# Altium PCB fan_tolips_f1_v1.PcbDoc
Units mm, origin at the board's own origin, x right, y up, seen from the top; angles counter-clockwise.
Board outline 46 x 221.4 mm, 2 copper layers (Top Layer, Bottom Layer); 52 components, 74 nets, 185 pads, 0 vias.
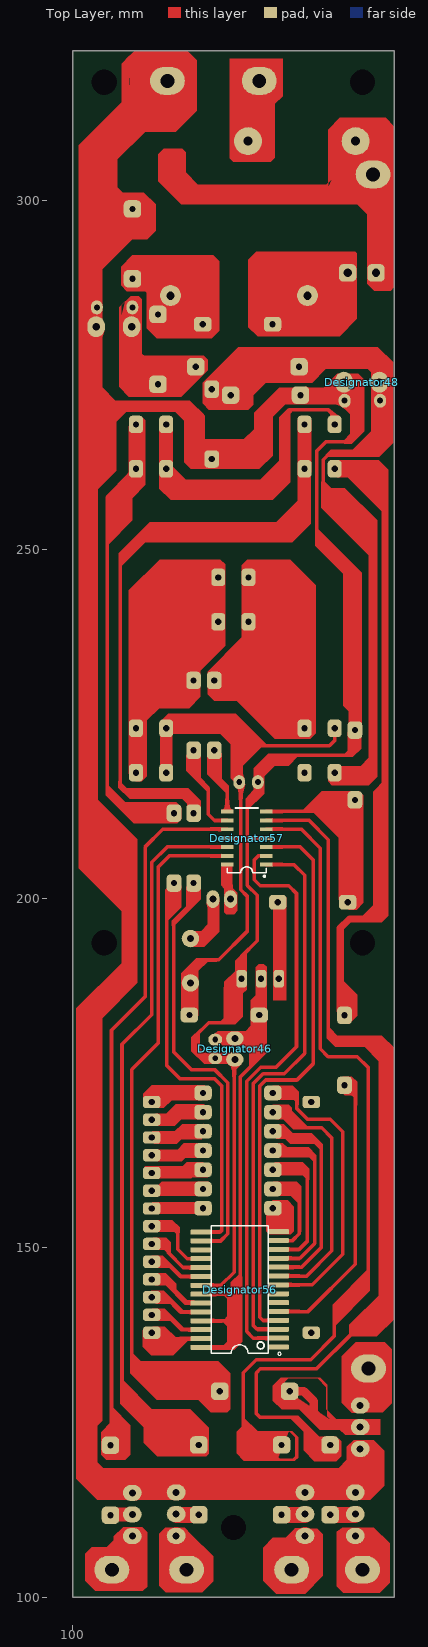
[diagram p0: Top Layer view]
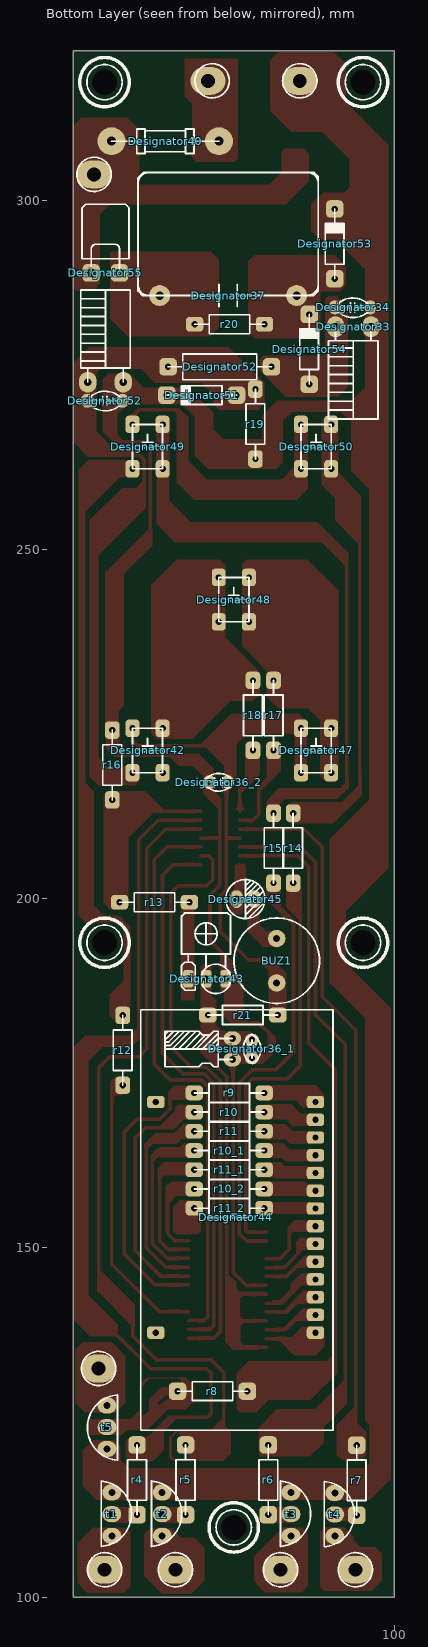
[diagram p1: Bottom Layer view, seen from below]

## Layer stack, top to bottom
Top Solder: solder mask 0.0102, Solder Resist, Dk 3.5
Top Layer: signal copper 0.0356
Dielectric 1: dielectric 0.32, FR-4, Dk 4.8
Bottom Layer: signal copper 0.0356
Bottom Solder: solder mask 0.0102, Solder Resist, Dk 3.5

## Board outline
100,100 146,100 146,321.4 100,321.4

## Design rules (kind name [scope] priority, off if disabled: settings)
Clearance [All] p1: gap=0.381 ignorepadtopadclearanceinfootprint=FALSE
ComponentClearance [All] p1: gap=0 collisioncheckmode=3 verticalgap=0 showdistances=FALSE
PolygonConnect [All] p1: connectstyle=Relief reliefconductorwidth=0.254 reliefentries=4 polygonreliefangle="90 Angle" airgapwidth=0.254
RoutingVias [All] p1: holewidth=0.711 width=1.27 viastyle="Through Hole" minholewidth=0.711 minwidth=1.27 maxholewidth=0.711 maxwidth=1.27
SolderMaskExpansion [All] p1: expansion=0.102
Width [All] p1: maxlimit=5 minlimit=0.254 preferedwidth=0.254 minimp=50.000000 maximp=50.000000 favimp=50.000000
29 further rules are at their usual default settings.

## Components (designator, comment, footprint, x,y, rotation, side; value= is the part's Value field where it differs from the comment)
BUZ1 "Comment" BUZZER 116.85,187.95 r90 bottom
Designator33 "Comment" CAP-EL-200MIL-RA 103.35,281.9 r0 bottom
Designator34 "Comment" CAP-ADASI-200MIL 108.53,284.65 r180 bottom
Designator36_1 "Comment" CAP-ADASI-105MIL 120.4,179.828 r270 bottom
Designator36_2 "Comment" CAP-ADASI-105MIL 123.833,216.7 r0 bottom
Designator37 "Comment" CAP-POLY 133.601,286.35 r180 bottom
Designator40 "Comment" FUZE 125.1,308.45 r0 bottom
Designator42 "Comment" SW-PUSH 137.5,218.05 r180 bottom locked
Designator43 "Comment" IR-RECIVER 129.5,188.55 r180 bottom
Designator44 "Comment" display_f1 111.3,170.9 r0 bottom locked
Designator45 "Comment" CAP-EL-100MIL 122.6,199.95 r180 bottom
Designator46 "Comment" CAP-EL-105MIL-RA 123.2,180 r270 top
Designator47 "Comment" SW-PUSH 113.368,218.05 r180 bottom locked
Designator48 "Comment" CAP-EL-200MIL-RA 138.82,273.95 r0 top
Designator48 "Comment" SW-PUSH 125.15,239.65 r180 bottom locked
Designator49 "Comment" SW-PUSH 137.5,261.55 r180 bottom locked
Designator50 "Comment" SW-PUSH 113.368,261.55 r180 bottom locked
Designator51 "Comment" DIOD 132.6,272.1 r180 bottom
Designator52 "Comment" RES-0.5W 132.4,276.15 r180 bottom
Designator52 "Comment" CAP-ADASI-200MIL 144,271.3 r180 bottom
Designator53 "Comment" DIOD 108.55,298.75 r270 bottom
Designator54 "Comment" DIOD 112.2,283.65 r270 bottom
Designator55 "Comment" SELF 143.414,289.6 r180 bottom
Designator56 "Comment" sop-28 123.9,144.05 r180 top
Designator57 "Comment" SOP-14 127.7,204.9 r180 top
r4 "Comment" RES-0.25W#1 136.85,111.8 r90 bottom
r5 "Comment" RES-0.25W#1 129.9,111.8 r90 bottom
r6 "Comment" RES-0.25W#1 118.05,111.8 r90 bottom
r7 "Comment" RES-0.25W#1 105.4,111.75 r90 bottom
r8 "Comment" RES-0.25W#1 131.05,129.5 r180 bottom
r9 "Comment" RES-0.25W#2 128.65,172.2 r180 bottom
r10 "Comment" RES-0.25W#2 128.65,169.45 r180 bottom
r10_1 "Comment" RES-0.25W#2 128.65,163.95 r180 bottom
r10_2 "Comment" RES-0.25W#2 128.65,158.45 r180 bottom
r11 "Comment" RES-0.25W#2 128.65,166.7 r180 bottom
r11_1 "Comment" RES-0.25W#2 128.65,161.2 r180 bottom
r11_2 "Comment" RES-0.25W#2 128.65,155.7 r180 bottom
r12 "Comment" RES-0.25W#2 138.9,183.3 r270 bottom
r13 "Comment" RES-0.25W#2 139.35,199.5 r180 bottom
r14 "Comment" RES-0.25W#2 114.5,212.25 r270 bottom
r15 "Comment" RES-0.25W#2 117.3,212.25 r270 bottom
r16 "Comment" RES-0.25W#2 140.4,224.15 r270 bottom
r17 "Comment" RES-0.25W#2 117.3,231.25 r270 bottom
r18 "Comment" RES-0.25W#2 120.25,231.25 r270 bottom
r19 "Comment" RES-0.25W#2 119.9,272.95 r270 bottom
r20 "Comment" RES-0.25W#2 118.6,282.25 r0 bottom
r21 "Comment" RES-0.25W#2 126.7,183.35 r180 bottom
t1 "Comment" bt131 140.45,115 r270 bottom
t2 "Comment" bt131 133.25,115 r270 bottom
t3 "Comment" bt131 114.8,115 r270 bottom
t4 "Comment" bt131 108.53,114.95 r270 bottom
t5 "Comment" bt131 141.15,121.25 r90 bottom

## Footprints (in the part's own frame and the unit in brackets; to place one, negate y for a bottom-side part, rotate by r counter-clockwise, add the part's x,y. Pads: shape width x height; smd on the part's side, far side on the other; paste and mask are expansions set on the pad)
bt131 [mm]
  oval 2.3x2.7 hole 1: A1(0,0) A2(6.2,0) G(3.1,0)
  silkscreen extent -1.62,-1.52 7.72,2.8
BUZZER [mm]
  round 2.5 hole 1: 1(0,0) 2(6.35,0)
  silkscreen extent -2.94,-6.12 9.29,6.12
CAP-ADASI-105MIL [mm]
  oval 1.7x2 hole 0.85: 1(0,0) 2(2.667,0)
  silkscreen extent -0.76,-1.25 3.41,1.3
CAP-ADASI-200MIL [mm]
  oval 1.7x2 hole 0.85: 1(0,0) 2(5.08,0)
  silkscreen extent -0.25,-2.05 5.25,1.35
CAP-EL-100MIL [mm]
  oval 1.829x2.54 hole 1: +(2.54,0) -(0,0)
  silkscreen extent -1.52,-2.79 4.06,2.79
CAP-EL-105MIL-RA [mm]
  oval 2x2.5 hole 1: +(3,0) -(0,0)
CAP-EL-200MIL-RA [mm]
  oval 2.5x3 hole 1.1: +(0,0) -(5.08,0)
  silkscreen extent -1.02,0 6.1,13.21
CAP-POLY [mm]
  round 3 hole 1.2: 1(0,0) 2(19.6,0)
  silkscreen extent -3.1,-1.6 22.7,17.6
DIOD [mm]
  rrect50% 2.5x2.5 hole 0.9: a(10,0) c(0,0)
  silkscreen extent 0,-1.35 10,1.35
display_f1 [mm]
  rrect50% 2.5x1.778 hole 0.9: 1(0,0) 2(0,2.54) 3(0,5.08) 4(0,7.62) 5(0,10.16) 6(0,12.7) 7(0,15.24) 8(0,17.78) 9(0,20.32) 10(0,22.86) 11(0,25.4) 12(0,27.94) 13(0,30.48) 14(0,33.02) 15(22.86,0) 16(22.86,33.02)
  silkscreen extent -2.5,-13.21 25,46.99
FUZE [mm]
  round 4 hole 1.3: 1(0,0) 2(15.4,0)
  silkscreen extent 0,-1.75 15.4,1.75
IR-RECIVER [mm]
  rrect50% 1.5x2.5 hole 0.9: 1(0,0) 2(2.54,0) 3(5.334,0)
  silkscreen extent -0.97,-2.13 6.05,9.4
RES-0.5W [mm]
  rrect50% 2.5x2.5 hole 0.9: 1(0,0) 2(14.8,0)
  silkscreen extent 0,-1.85 14.8,1.85
RES-0.25W#1 [mm]
  rrect50% 2.5x2.5 hole 0.9: 1(0,0) 2(10,0)
  silkscreen extent 0,-1.35 10,1.35
RES-0.25W#2 [mm]
  rrect50% 2.5x2.1 hole 0.9: 1(0,0) 2(10,0)
  silkscreen extent 0,-1.35 10,1.35
SELF [mm]
  rrect50% 2.5x2.5 hole 1.2: 1(0,0) 2(4.064,0)
  silkscreen extent -1.32,0 5.42,9.81
SOP-14 [mil]
  rect 69x22 smd: 1(0,1) 2(0,-49) 3(0,-99) 4(0,-149) 5(0,-199) 6(0,-249) 7(0,-299) 8(220,-299) 9(220,-249) 10(220,-199) 11(220,-149) 12(220,-99) 13(220,-49) 14(220,1)
  silkscreen extent 0,-319 220,71
sop-28 [mm]
  rrect50% 3.048x0.711 smd: 1(-5.55,8.225) 2(-5.55,6.955) 3(-5.55,5.685) 4(-5.55,4.415) 5(-5.55,3.145) 6(-5.55,1.875) 7(-5.55,0.605) 8(-5.55,-0.665) 9(-5.55,-1.935) 10(-5.55,-3.205) 11(-5.55,-4.475) 12(-5.55,-5.745) 13(-5.55,-7.015) 14(-5.55,-8.285) 15(5.55,-8.225) 16(5.55,-6.955) 17(5.55,-5.685) 18(5.55,-4.415) 19(5.55,-3.145) 20(5.55,-1.875) 21(5.55,-0.605) 22(5.55,0.665) 23(5.55,1.935) 24(5.55,3.205) 25(5.55,4.475) 26(5.55,5.745) 27(5.55,7.015) 28(5.55,8.285)
  silkscreen extent -5.92,-9.1 4.1,9.42
SW-PUSH [mm]
  rrect50% 2x2.5 hole 0.9: 1(0,0) 1(0,6.35) 2(4.318,0) 2(4.318,6.35)
  silkscreen extent 0,0 4.32,6.35

## Free pads (board coordinates)
  round 1.524 hole 3.6: 8(104.5,193.7) 8(104.5,316.9) 8(123,110) 8(141.5,193.7) 8(141.5,316.9)
  oval 5x4 hole 2: 9(105.59,103.938) 9(113.55,317.1) 9(116.303,103.938) 9(126.7,317.1) 9(131.347,103.938) 9(141.486,103.938) 9(142.35,132.75) 9(143,303.7)

## Nets (pads, with @x,y where several pads share a name; then routed paths per layer and width w, separated by ;. In a path a pad name is that pad's centre, name@x,y a point inside that pad or via, vN(x,y) a via of type N, cw(c..) or ccw(c..) an arc to the next point about the centre after c; other vN are vias at no path point)
a1: pad.9@105.59,103.938 t4.A2 | length 6
  Top Layer w2.54: pad.9@105.59,103.938 108.53,106.878 t4.A2
a2: pad.9@116.303,103.938 t3.A2 | length 3.4
  Top Layer w2.54: 114.8,107.6 t3.A2 ; pad.9@116.303,103.938 116.303,106.097
a3: pad.9@131.347,103.938 t2.A2 | length 5.6
  Top Layer w2.54: pad.9@131.347,103.938 133.25,105.841 t2.A2
a4: pad.9@142.35,132.75 t5.A2 | length 5.8
  Top Layer w1.27: t5.A2 141.15,131.55 pad.9@142.35,132.75
a5: pad.9@141.486,103.938 t1.A2 | length 1.5
  Top Layer w2.54: pad.9@140.45,104.974 pad.9@141.486,103.938
AC1: Designator40.1 pad.9@126.7,317.1 | length 9.1
  Top Layer w1.27: Designator40.1 126.1,309.45 pad.9@126.7,317.1
AC2: Designator33.+ Designator34.2 Designator36_1.2 Designator36_2.2 Designator43.3 Designator46.+ Designator48.+ Designator51.c Designator52.2@138.92,271.3 Designator53.c Designator56.21 Designator57.4 pad.9@113.55,317.1 r16.1 r19.2 t1.A1 t2.A1 t3.A1 t4.A1 t5.A1 | length 468.6
  Top Layer w0.508: Designator56.21 121.205,144.655 123.1,146.55 123.1,177.033 Designator46.+@122.883,177.25 ; Designator36_1.2 118.639,177.161 117.5,178.3 117.5,180.3 119.45,182.25 121.3,182.25 121.85,182.8 121.85,187.25 123.15,188.55 Designator43.3 124.166,191.741 126.4,193.975 126.4,200.5 125,201.9 125,208.65 ; Designator36_1.2@120.4,177.25 Designator46.+@122.883,177.25 ; Designator46.+@123.95,177.25 Designator46.+@122.883,177.25 ; Designator57.4 125.035,208.685 125,208.65 ; r16.1@140.35,224.6 140.35,221.9 139,220.55 128.6,220.55 126.6,218.55 126.6,215.841 125,214.241 125,208.65 ; r16.1 140.4,247.25 134.95,252.7 134.95,264.1 136.25,265.4 139,265.4 140.9,267.3
  Top Layer w1.524: 102.8,270.9 102.8,284.65 102.8,298.2 ; Designator53.c 103.35,298.75 102.8,298.2 ; pad.9@113.55,317.1 113.55,314.95 102.8,304.2 102.8,298.2 ; r19.2 118.15,264.7 118.15,268.9 116.55,270.5 102.8,270.5 102.8,204.65 108.53,198.92 108.53,188.33 102.8,182.6 102.8,117.65 105.45,115 t3.A1 t2.A1 t1.A1 141.15,115.7 t5.A1 ; 127.1,264.3 127.1,269.5 129.7,272.1 Designator51.c Designator52.2@138.82,272.1 ; Designator48.+ Designator52.2@138.82,272.1 ; 140.9,267.3 140.9,271.225 140.025,272.1 Designator52.2@138.82,272.1
b1: r8.1 t5.G | length 10
  Top Layer w1.27: r8.1 133.05,129.5 134.5,128.05 134.5,126.45 136.1,124.85 138.2,124.85
b2: r6.1 t3.G | length 3.3
  Top Layer w2.286: t3.G 114.9,111.8 r6.1
b3: r5.1 t2.G | length 3.4
  Top Layer w2.286: r5.1 133.15,111.8 t2.G
b4: r4.1 t1.G | length 3.6
  Top Layer w2.286: r4.1 140.35,111.8 t1.G
C1: Designator40.2 Designator55.1 pad.9@143,303.7 | length 21.2
  Top Layer w1.27: Designator40.2 142.75,308.45 143.1,308.1 Designator55.1@143.1,289.65
C2: Designator37.1 Designator55.2 r20.2 | length 13.6
  Top Layer w1.27: r20.2@128.6,282 129.251,282 Designator37.1 136.901,289.65 Designator55.2@139.036,289.65
C3: Designator37.2 Designator53.a Designator54.c r20.1 | length 15
  Top Layer w1.524: Designator53.a 111.601,288.75 Designator37.2 114.001,282.751 113.95,282.7 118.15,282.7 r20.1
C4: Designator33.- Designator34.1 Designator52.2@117.6,276.15 Designator54.a | length 21
  Top Layer w1.27: Designator34.1 108.53,274.57 109.55,273.55 112.3,273.55 112.3,274.1 114.35,276.15 Designator52.2@117.6,276.15
D1: Designator44.14 Designator56.27 | length 7.4
  Top Layer w0.508: Designator44.14 113.671,137.88 114.516,137.035 Designator56.27
D2: Designator44.13 Designator56.26 | length 7.9
  Top Layer w0.508: Designator44.13 113.43,140.42 115.545,138.305 Designator56.26
D3: Designator44.12 Designator56.24 | length 7.9
  Top Layer w0.508: Designator44.12 113.29,142.96 115.405,140.845 Designator56.24
D4: Designator44.11 Designator56.23 | length 8.9
  Top Layer w0.508: Designator44.11 113.6,145.5 114.35,144.75 114.35,144 116.235,142.115 Designator56.23
D5: Designator44.10 Designator56.20 | length 7.9
  Top Layer w0.508: Designator44.10 113.31,148.04 115.425,145.925 Designator56.20
D6: Designator44.9 Designator56.19 | length 8.9
  Top Layer w0.508: Designator44.9 113.17,150.58 113.7,150.05 113.7,149.3 115.805,147.195 Designator56.19
D7: Designator44.8 Designator56.18 | length 10.4
  Top Layer w0.508: Designator44.8 114.13,153.12 115.05,152.2 115.05,149.8 116.385,148.465 Designator56.18
D8: 
D9: 
DC1: Designator56.8 r9.1 | length 41.9
  Top Layer w0.508: r9.1 131.7,172.2 132.1,171.8 132.1,169.95 133.6,168.45 136.85,168.45 138.65,166.65 138.65,149.1 134.265,144.715 Designator56.8
DC2: Designator56.9 r10.1 | length 35.8
  Top Layer w0.508: r10.1 130.8,169.45 131.45,168.8 131.45,167.9 132.125,167.225 135.625,167.225 137.1,165.75 137.1,149.6 133.485,145.985 Designator56.9
DC3: Designator56.10 r11.1 | length 29.4
  Top Layer w0.508: r11.1 130.65,166.7 131.725,165.625 134.225,165.625 135.55,164.3 135.55,150.05 132.755,147.255 Designator56.10
DC4: Designator56.11 r10_1.1 | length 24.5
  Top Layer w0.508: r10_1.1 133.2,163.95 134.65,162.5 134.65,150.65 132.525,148.525 Designator56.11
DC5: Designator56.12 r11_1.1 | length 19.1
  Top Layer w0.508: r11_1.1 132.45,161.2 133.601,160.049 133.601,151.001 132.395,149.795 Designator56.12
DC6: Designator56.13 r10_2.1 | length 13
  Top Layer w0.508: r10_2.1 131.4,158.45 132.425,157.425 132.425,152.025 131.465,151.065 Designator56.13
DC7: Designator56.14 r11_2.1 | length 3.7
  Top Layer w0.508: r11_2.1 129.45,154.9 Designator56.14
DC8: Designator56.5 r12.2 | length 40.1
  Top Layer w0.508: Designator56.5 133.68,140.905 140.45,147.675 140.45,171.75 r12.2
DM1: Designator44.1 r9.2 | length 7.9
  Top Layer w0.508: Designator44.1 112.6,172.2 r9.2
DM2: Designator44.2 r10.2 | length 7.8
  Top Layer w0.508: Designator44.2 113.76,168.36 114.85,169.45 r10.2
DM3: Designator44.3 r11.2 | length 7.7
  Top Layer w0.508: Designator44.3 114.22,165.82 115.1,166.7 r11.2
DM4: Designator44.4 r10_1.2 | length 7.6
  Top Layer w0.508: Designator44.4 114.83,163.28 115.5,163.95 r10_1.2
DM5: Designator44.5 r11_1.2 | length 7.5
  Top Layer w0.508: Designator44.5 111.76,161.2 r11_1.2
DM6: Designator44.6 r10_2.2 | length 7.5
  Top Layer w0.508: Designator44.6 118.4,158.2 r10_2.2
DM7: Designator44.7 r11_2.2 | length 7.4
  Top Layer w0.508: Designator44.7 118.61,155.66 r11_2.2
DM8: 
DM9: 
E1: Designator56.15 r14.2 | length 59.4
  Top Layer w0.508: r14.2 113.45,201.2 113.45,176.13 115.38,174.2 120.35,174.2 121.3,173.25 121.3,152.5 121.075,152.275 Designator56.15
E2: Designator56.16 r15.2 | length 60.8
  Top Layer w0.508: r15.2 117.3,199.35 114.45,196.5 114.45,178.05 116.95,175.55 120.3,175.55 122.211,173.639 122.211,152.061 121.155,151.005 Designator56.16
F1: Designator56.2 Designator57.2 | length 83.5
  Top Layer w0.508: Designator57.2 126.595,206.145 126,205.55 126,202.7 126.85,201.85 130.935,201.85 132.035,200.75 132.035,178.835 129.1,175.9 126.936,175.9 124.9,173.864 124.9,138.05 125.855,137.095 Designator56.2
F2: Designator56.3 Designator57.1 | length 79.2
  Top Layer w0.508: Designator57.1 131.675,204.875 133.2,203.35 133.2,177.85 130.289,174.939 127.241,174.939 125.85,173.548 125.85,138.9 126.385,138.365 Designator56.3
F3: Designator56.4 Designator57.3 | length 81.6
  Top Layer w0.508: Designator57.3 132.581,207.415 134.4,205.595 134.4,176.35 132.1,174.05 127.61,174.05 126.75,173.19 126.75,140.1 127.215,139.635 Designator56.4
G1: Designator49.1@137.5,267.9 Designator50.1 | length 42.1
  Top Layer w0.508: Designator50.1@113.368,267.9 113.368,261.55 113.368,261.282 115.25,259.4 128.2,259.4 130.1,261.3 130.1,269.1 131,270 136.6,270 137.5,269.1 Designator49.1@137.5,267.9
G2: Designator50.2 r14.1 | length 65
  Top Layer w0.508: Designator50.2@109.05,267.9 109.05,261.55 104.95,257.45 104.95,215.45 108.15,212.25 r14.1
G3: Designator49.2 r15.1 | length 86.2
  Top Layer w0.508: r15.1 117.3,213.8 116.3,214.8 108.35,214.8 106.8,216.35 106.8,247.75 111.4,252.35 129.5,252.35 133.182,256.032 133.182,261.55 Designator49.2@133.182,267.9
G4: Designator49.1@137.5,261.55 r12.1 | length 88.4
  Top Layer w1.016: Designator49.1@137.5,261.55 141.4,261.55 144.7,258.25 144.7,198.85 142.95,197.1 139.6,197.1 138.3,195.8 138.3,183.9 r12.1
G5: Designator47.2 Designator48.2 r17.1 | length 54.1
  Top Layer w0.508: Designator47.2@109.05,218.05 109.05,224.4 109.05,242.65 112.4,246 120.832,246 120.832,239.65 120.832,238.182 119.5,236.85 119.3,236.85 117.3,234.85 r17.1
G6: Designator42.2@133.182,224.4 Designator48.1 r18.1 | length 34.2
  Top Layer w0.508: r18.1 122.15,231.25 ; Designator48.1@125.15,246 125.15,239.65 125.15,234.25 122.15,231.25 ; Designator42.2@133.182,224.4 133.182,228.568 130.5,231.25 122.15,231.25
GND: Designator42.1@137.5,218.05 Designator48.- Designator51.a Designator52.1 r19.1 | length 90.8
  Top Layer w0.508: Designator42.1@137.5,218.05 141.4,218.05 142.8,219.45 142.8,250.1 135.85,257.05 135.85,262.85 136.575,263.575 141.975,263.575 144,265.6 Designator52.1@144,271.3 ; 142.35,277.4 133.65,277.4 132.4,276.15 143.1,276.15 143.9,275.35 Designator48.-
GND_G: Designator36_1.1 Designator43.2 Designator46.- Designator56.22 Designator56.25 Designator56.28 r21.1 | length 76.1
  Top Layer w0.508: Designator56.28 122.64,135.765 124.009,137.134 124.009,174.509 126.96,177.46 126.96,180.01 ; Designator56.25 123.9,139.575 ; Designator56.22 123.925,143.385 ; Designator36_1.1@120.95,179.867 126.817,179.867 126.96,180.01 ; Designator43.2 126.96,180.01
GND_S: BUZ1.1 Designator36_2.1 Designator42.1@137.5,224.4 Designator47.1 Designator57.11 r21.2 | length 83.5
  Top Layer w0.508: Designator47.1@113.368,218.05 113.368,224.4 113.368,225.318 114.25,226.2 122.7,226.2 124,224.9 124,221.95 ; r21.2 116.7,187.8 BUZ1.1 116.85,190.1 118,191.25 120.9,191.25 124.95,195.3 124.95,200.4 124.05,201.3 124.05,208.817 ; Designator57.11 123.918,208.685 124.05,208.817 ; Designator36_2.1 124.05,216.483 124.05,208.817 ; Designator36_2.1@124,216.7 124,221.95 ; Designator42.1@137.5,224.4 137.5,222.65 136.75,221.9 124.05,221.9 124,221.95
H1: Designator57.9 r17.2 | length 13.1
  Top Layer w0.508: r17.2 117.3,217.95 119.4,215.85 119.4,212.1 120.275,211.225 Designator57.9
H2: Designator57.8 r18.2 | length 9.5
  Top Layer w0.508: r18.2 120.25,217.15 122.112,215.288 Designator57.8
H3: Designator57.7 r13.1 r16.2 | length 27
  Top Layer w0.508: Designator57.7 139.645,212.495 ; r13.1 139.35,212.2 139.645,212.495 ; r16.2 140.4,213.25 139.645,212.495
H4: Designator57.6 r4.2 | length 122.7
  Top Layer w0.508: Designator57.6 133.825,211.225 136.6,208.45 136.6,180.1 137.65,179.05 142.2,179.05 144.3,176.95 144.3,143.4 139.825,138.925 139.825,137.625 134.9,132.7 126.85,132.7 126.25,132.1 126.25,126.3 126.8,125.75 131.3,125.75 135.25,121.8 r4.2
H5: Designator57.5 r5.2 | length 116.1
  Top Layer w0.508: Designator57.5 132.745,209.955 135.45,207.25 135.45,178.5 136.55,177.4 140.75,177.4 142.3,175.85 142.3,145.93 137.45,141.08 137.45,137.4 134.05,134 126.25,134 124.4,132.15 124.4,123.55 126.15,121.8 r5.2
H6: Designator57.10 r7.2 | length 100.5
  Top Layer w0.508: r7.2 105.55,121.9 105.55,181.15 110.35,185.95 110.35,207.4 112.905,209.955 Designator57.10
H7: Designator57.12 r6.2 | length 103.9
  Top Layer w0.508: r6.2 118.05,124.15 115.55,126.65 111.3,126.65 107.05,130.9 107.05,179.15 111.3,183.4 111.3,205.2 113.515,207.415 Designator57.12
H8: Designator57.13 r8.2 | length 97.3
  Top Layer w0.508: r8.2 119.85,130.7 111.45,130.7 108.45,133.7 108.45,175.55 112.25,179.35 112.25,204.55 113.845,206.145 Designator57.13
H9: Designator45.- Designator57.14 | length 6.3
  Top Layer w0.508: Designator57.14 122.6,204.387 Designator45.- 122.6,199.3 Designator45.-@122.2,198.9
H10: BUZ1.2 Designator45.+ | length 6.9
  Top Layer w0.508: BUZ1.2 118.85,194.3 119.66,195.11 Designator45.+@119.66,198.9
J1: Designator43.1 r13.2 | length 12.5
  Top Layer w0.508: r13.2 129.35,187.084 129.384,187.05
J2: 
J3: 
J4: 
J5: 
J6: 
J7: 
k1: r7.1 t4.G | length 3.2
  Top Layer w2: r7.1 105.5,111.85 t4.G
NewNet: 
pads on no net: Designator42.2@133.182,218.05 Designator44.15 Designator44.16 Designator56.1 Designator56.6 Designator56.7 Designator56.17

## Other copper
Top Layer:
  rectangle net J1: 128.65,185.45 130.575,200.25
  rectangle net GND_S: 112.5,217.475 114.3,224.35
  rectangle net DM7: 111.325,154.85 119.3,156.55
  rectangle net G3: 132.2,261.05 134.15,268.55
  region net GND_S: 116.7,183.35 116.2,183.35 115.5,184.05 115.5,189.35 117.65,191.5 120.65,191.5 120.9,191.25 120.65,191 119.3,191 118,189.7 118,183.25 117.7,182.95
  region net AC2: 123.217,177.983 124.1,177.1 124.1,176.3 123.1,175.3 123.1,175.7 122.45,176.35 118.85,176.35 117,178.2 117,180.15 118.15,181.3 118.15,178.65 118.817,177.983
  region net H10: 121,200 121,195.3 118.8,193.1 117.1,193.1 117.1,194.4 116.85,194.65 117.55,195.35 118.4,195.35 119.362,196.312 119.362,199.8
  region net E1: 114.6,203.2 113.9,202.5 114.85,202.5 115.5,201.85 115.5,198.75 113.515,196.765 113.515,201.765 113.8,202.05
  region net H9: 121.45,205.05 121.45,204.8 121.25,204.6 121.25,201.9 121.7,201.45 121.7,198.05 121.95,197.8 123.1,197.8 123.55,198.25 123.55,200.85 122.85,201.55 122.85,204.85 122.8,204.9
  region net E2: 117.25,202.65 117.153,202.65 116.25,201.747 116.25,198.9 114.2,196.85 114.2,196.1 114.55,196.1 118.35,199.9 118.35,202.45
  region net AC2: 124.9,192.35 124.95,192.4 124.85,192.5 124.6,192.5 123.25,191.15 123.25,189.65 121.7,188.1 121.7,182.65 121.3,182.25 121.5,182.05 123.3,182.05 124.35,183.1 124.35,186.45 124.9,187
  region: 120,179.3
  region net GND_G: 120.35,180.65 120.75,181.05 124.75,181.05 125.5,181.8 125.5,185.45 126.2,186.15 126.2,190.2 126.65,190.65 127.35,190.65 127.75,190.25 127.75,177.983 125.567,175.8 125.3,175.8 125.3,178.1 124.35,179.05 121.4,179.05
  region net AC2: 127.4,217.025 127.4,215.05 125,212.65 125,214.5 125.9,215.4 125.9,216.517
  region net DC8: 138.65,174.55 139.95,174.55 140.7,173.8 140.7,170.45 140.6,170.35 140.2,170.75 140.2,171.55 139.9,171.85 138.95,171.85 138.35,172.45
  region net H5: 142.55,146.95 142.55,143.85 137.6,138.9 137.6,138.35 137.2,138.75 137.2,141.9 142.3,147 142.3,147.85
  region net H4: 139.579,137.35 143.55,137.35 146,139.8 146,178.65 144.25,180.4 137.9,180.4 136.85,181.45 136.6,181.45 136.6,180.1 137.85,178.85 141.7,178.85 143.8,176.75 143.8,142.964 139.825,138.6
  region net GND_G: 118.55,143.75 122.15,143.75 122.65,144.25 122.65,145.061 123.989,146.4 123.989,146.161 124.25,145.9 124.25,136.6 123.1,135.45 119.575,135.45 119.425,135.6 119.438,135.612 119.438,136.1 121.65,136.1 122.1,136.55 122.1,138.8 121.6,139.3 121.6,139.65 122.15,140.2 122.15,142.7 121.7,143.15 119.75,143.15
  region net G4: 138.35,182.1 139.6,182.1 140.75,183.25 140.75,186.25 138.5,188.5 138.5,188.65
  region net H2: 120.05,221.45 120.05,221.288 119.25,220.488 119.25,217.8 121.762,215.288 122.35,215.288 122.35,216.15 121.35,217.15 121.35,220.85
  region net H1: 117.25,221.55 116.25,220.55 116.25,218.325 119.175,215.4 119.55,215.4 119.55,216.05 118.3,217.3 118.3,220.7
  region net H4: 135.3,123 132.3,126 131.2,126 131.2,125.575 133.05,123.725 133.05,121.05 134.6,119.5 137.75,119.5 138.45,120.2 138.45,122.3 137.75,123
  region net H5: 129.4,120.05 129.6,119.85 131.5,119.85 131.85,120.2 131.85,122.9 131,123.75 126.45,123.75 124.4,125.8 124.4,124.65 123.45,123.7 123.45,120.6 124.5,119.55 131.8,119.55 132.25,120 132.25,122.9 131.4,123.75 130.95,123.75
  region net b1: 130.4,129.7 130.3,129.8 130.3,130.8 130.85,131.35 135.05,131.35 136.3,130.1 136.3,126.95 137.75,125.5 139.25,125.5 144,125.5 144,123.25 139,123.25 138.25,124 135.35,124 132.45,126.9 129.9,126.9 128.65,128.15 128.65,130.25 129.8,131.4 135.45,131.4 136.45,130.4 136.45,125.9 137.1,125.25
  region net H6: 105.65,128.15 105.65,127.25 108.25,124.65 108.25,120.4 107.5,119.65 104.8,119.65 104.05,120.4 104.05,123.65 105.5,125.1
  region net H6: 104.15,121.75 104.15,123.55 105.55,124.95 106.6,123.9 106.6,121.55
  region net H7: 107.2,130.75 111.05,126.9 116.85,126.9 119.45,124.3 119.45,120.55 119.1,120.2 112.1,120.2 110.15,122.15 110.15,124.35 106.8,127.7 106.8,130.99
  region net H8: 108.5,135.5 108.5,135 109.7,133.8 120.85,133.8 122.55,132.1 122.55,126.9 122.15,126.5 119.75,126.5 118,128.25 112.05,128.25 108.2,132.1 108.2,134.1
  region net D1: 110.05,138.25 110.05,135.85 111.25,134.65 114.4,134.65 116.45,136.7 117.4,136.7
  region net D1: 111.462,138.75 113.2,138.75 114.8,137.15 111.95,137.15 111.75,137.35
  region net D2: 111.363,141.3 113.15,141.3 116.085,138.365 115.605,138.365 115.545,138.305 114.3,139.55 111.85,139.55
  region net D3: 111.225,143.85 113.02,143.85 115.87,141 116.95,141 116.6,140.65 116.5,140.75 115.5,140.75 114.2,142.05 111.9,142.05
  region net D4: 111.225,146.4 113.3,146.4 114.83,144.87 114.83,144.07 116.4,142.5 117.4,142.5 117.4,142.2 117.55,142.05 117.4,141.9 116.05,141.9 113.3,144.65 111.8,144.65
  region net D5: 111.325,148.9 112.855,148.9 115.805,145.95 115.1,145.95 113.85,147.2 111.6,147.2
  region net D6: 111.55,151.45 113.405,151.45 114.05,150.805 114.05,148.95 113.7,149.3 113.54,149.3 113.105,149.735 111.65,149.735
  region net D7: 111.325,154 114.28,154 115.3,152.98 115.3,152.15 115.2,152.15 114.95,151.9 114.55,152.3 111.5,152.3 111.4,152.4
  region net DM6: 119.45,159.475 119.425,159.5 112.73,159.5 111.85,158.62 111.85,157.9 112.3,157.45 119.05,157.45 119.45,157.85
  region net DM5: 118.7,162.25 116.3,162.25 115.75,161.7 110.4,161.7 110.25,161.55 110.3,161.5 110.3,160.55 110.9,159.95 116.951,159.95 117.151,160.15 119.3,160.15 119.5,160.35
  region net DM4: 118.75,165 115.9,165 115,164.1 111.45,164.1 111,163.65 111.25,163.4 111.25,163.05 111.6,163.05 112.25,162.4 115.6,162.4 116.1,162.9 118.35,162.9
  region net DM3: 118.75,167.8 118.7,167.75 115.65,167.75 114.6,166.7 111.4,166.7 111.3,166.6 111.35,166.55 111.35,165.3 111.7,164.95 114.9,164.95 115.55,165.6 118.45,165.6
  region net DM2: 118.85,170.55 114.75,170.55 113.4,169.2 111.85,169.2 111.05,168.4 111.35,168.1 111.35,167.85 111.5,167.85 111.85,167.5 114.6,167.5 115.5,168.4 118.85,168.4 119.15,168.7
  region net DM1: 118.9,173.3 111.3,173.3 110.1,172.1 110.1,170.75 110.8,170.05 113.05,170.05 114.15,171.15 118.5,171.15
  region net G4: 137.65,262.8 143.8,262.8 145.2,261.4 145.2,255.45 144.725,254.975 140.85,258.85 139.35,260.35 137.85,260.35
  region net DC7: 128.65,156.8 130.75,156.8 131.65,155.9 131.65,152.425 131.225,152 128.1,152 127.7,152.4 127.7,155.7
  region net DC6: 128.7,159.45 128.75,159.5 132.05,159.5 132.7,158.85 132.7,152.3 132.25,151.85 132.25,156.4 131.2,157.45 129,157.45
  region net DC5: 128.95,162.25 132.95,162.25 133.85,161.35 133.85,159.75 133.5,159.4 133.45,159.45 133.45,160 133.05,160.4 129,160.4 128.95,160.45
  region net DC4: 128.825,165 130.1,165 130.7,164.4 133.755,164.4 134.875,163.28 134.875,162.05 134.75,162.05 134.55,161.85 134.5,161.9 134.5,162.35 133.85,163 129.05,163 128.85,163.2
  region net DC3: 128.65,167.7 130.2,167.7 131.5,166.4 134.25,166.4 135.8,164.85 135.8,164.3 135.25,164.3 134.6,164.95 131.15,164.95 130.45,165.65 129.1,165.65
  region net DC2: 128.6,170.5 130.95,170.5 131.35,170.1 131.35,169.65 131.725,169.275 133.8,167.2 132.45,167.2 132.25,167 131.6,167 130.85,167.75 130.15,168.45 129.05,168.45
  region net DC1: 128.65,173.2 131.525,173.2 132.35,172.375 132.35,170.5 132.1,170.25 132,170.35 132,170.9 131.65,171.25 128.95,171.25
  region net H3: 128.3,212.75 133,212.75 135.65,215.4 141.05,215.4 141.6,214.85 141.6,199.4 140.65,198.45 139.5,198.45 138.1,199.85 138.1,208.7 134.45,212.35 130.85,212.35
  region net G4: 144.7,217 143.05,215.35 143.05,199.1 141.4,197.45 140.9,197.45 140.9,197.3 141.6,196.6 144.25,196.6 145.2,197.55 145.2,215.95
  region net AC2: 132.1,220.75 128,220.75 125.9,218.65 125.9,216.517 126.45,215.967 126.683,216.2 127.1,216.2 127.4,216.5 127.4,217.55 128.9,219.05 130.9,219.05 132.225,220.375 132.85,220.375
  region net AC2: 139.6,224.05 139.4,223.85 139.4,221.15 138.8,220.55 139.05,220.3 140.1,220.3 141.275,221.475 141.275,223.9
  region net GND_S: 112.75,224.65 112.75,225.55 113.7,226.5 123.35,226.5 127.8,222.05 130.65,222.05 130.65,222 130.7,221.95 130.45,221.7 127,221.7 124.35,219.05 124.35,216.65 123.8,216.1 122.65,217.25 122.65,222.1 121.1,223.65 113.95,223.65 113.65,223.95
  region net AC2: 134.95,253.95 134.95,253.1 134.7,252.85 134.7,250.55 138.75,246.5 138.75,227.6 139.5,226.85 139.5,224.35 139.65,224.35 140.4,223.6 141.15,223.6 141.15,224.85 141.4,225.1 141.4,246.65 135,253.05 135,253.5
  region net GND: 136.9,218.5 136.55,218.15 136.55,216.8 137.1,216.25 142.4,216.25 143.6,217.45 143.6,254.15 138.95,258.8 137,258.8 136.1,259.7 135.6,259.7 135.6,256 142.4,249.2 142.4,227.1 142.4,220.15 141.25,219 137.75,219
  region net G3: 132.55,261.9 132.2,261.55 132.2,256.95 129.15,253.9 111.05,253.9 106.6,249.45 106.6,247.55 106.85,247.55 110.35,251.05 131.45,251.05 134.05,253.65 134.05,261.8 133.9,261.95
  region net G6: 124.2,247.75 125,248.55 131.15,248.55 134.8,244.9 134.8,227.25 134.8,223.7 134,222.9 128.95,222.9 123.5,228.35 120.25,228.35 119.3,229.3 119.3,232.5 124.2,237.4
  region net G5: 109,216.85 109.9,216.85 110.6,217.55 110.6,225.55 112.35,227.3 116.65,227.3 118.25,228.9 118.25,232.65 121.8,236.2 121.8,247.9 121.15,248.55 112.45,248.55 108.05,244.15 108.05,217.9 108.6,217.35
  region net G3: 116.4,211.8 116.4,213.6 115.7,214.3 108.15,214.3 106.55,215.9 106.55,216.8 106.75,216.8 107.767,215.783 116.567,215.783 118.3,214.05 118.3,211.65
  region net G2: 115.1,213.55 114.85,213.8 107.55,213.8 105.15,216.2 105.15,218 104.95,218 104.7,217.75 104.7,214.85 108.75,210.8 114.95,210.8 115.5,211.35 115.5,213.05
  region net G2: 109.45,268.85 109.225,268.85 108.05,267.675 108.05,260.95 104.8,257.7 104.8,251.1 105.125,250.775 108.5,254.15 108.5,257.35 110.4,259.25 110.4,268.5 109.9,269
  region net G1: 113.25,268.3 113.25,268.05 112.4,267.2 112.4,258.7 114,257.1 128.65,257.1 131.15,259.6 131.15,269.45 131.6,269.9 131.35,270.15 130.8,270.15 129.55,268.9 129.55,262.7 126.85,260 116.15,260 114.325,261.825 114.325,268.15
  region net AC2: 126.9,270.5 125.95,269.55 125.95,267.2 124.5,265.75 118.4,265.75 117.65,265 117.95,264.7 117.95,263.15 118.55,263.15 119.45,262.25 126.5,262.25 127.75,263.5 127.75,267.137
  region net AC2: 115.95,265.65 115.95,262.5 116.9,261.55 126.7,261.55 128.6,263.45 128.6,269 130.4,270.8 138.25,270.8 139.7,269.35 139.7,266.35 138.85,265.5 138.85,265.15 139.95,265.15 141.75,266.95 141.75,274.3 140.9,275.15 137.901,275.15 135.901,273.15 129.55,273.15 126.9,270.5 126.9,264.55 125.65,263.3 118.95,263.3 118.4,263.85
  region net a4: 141.3,126.4 139.95,126.4 138.5,127.85 138.5,130.7 138.5,134.5 140.5,136.5 144.65,136.5 145.65,135.5 145.65,127.75 144.35,126.45 142.05,126.45
  region net a5: 138.6,109.95 143.1,109.95 145.35,107.7 145.35,102.05 143.95,100.65 138.75,100.65 137.8,101.6 137.8,109.413
  region net a3: 133.55,109.9 133.5,109.85 131.8,109.85 131.8,109.8 130.5,108.5 128.65,108.5 127.25,107.1 127.25,102.35 129.1,100.5 133.25,100.5 135.8,103.05 135.8,109.025 135.025,109.8 134.6,109.8
  region: 116.75,109.5
  region net a2: 113.25,109.95 112.4,109.1 112.4,101.65 113.3,100.75 118.55,100.75 120.1,102.3 120.1,105.85 116.9,109.05 116,109.95
  region net a1: 108.9,101.15 108.65,100.9 103.25,100.9 101.8,102.35 101.8,106.228 102.722,107.15 104.9,107.15 105.9,108.15 105.9,108.7 107.2,110 109.95,110 110.65,109.3 110.65,101.5 110.05,100.9 108.65,100.9
  region net AC2: 108.25,316.4 108.1,316.55 108.1,320.6 108.9,321.4 116.4,321.4 117.75,320.05 117.75,312.8 114.75,309.8 110.35,309.8 106.4,305.85 106.4,301.85 107.15,301.1 110.2,301.1 111.9,299.4 111.9,295.6 110.7,294.4 108.5,294.4 104.2,290.1 104.2,273.2 106.1,271.3 116.725,271.3 118.9,269.125 118.9,265.15 119.65,264.4 119.1,263.85 117.7,263.85 117.7,263.9 115.95,265.65 115.95,268.45 114.65,269.75 107.65,269.75 106.2,268.3 106.2,261.25 103.6,258.65 103.6,214.15 109.25,208.5 109.25,187.95 104.2,182.9 104.2,125.3 103.2,124.3 103.2,119.6 104.35,118.45 104.4,118.5 138.05,118.5 139.25,119.7 139.25,121.55 140.2,122.5 143.1,122.5 144.6,121 144.6,115.95 142.6,113.95 103.5,113.95 100.5,116.95 100.5,184.3 107,190.8 107,198.2 100.85,204.35 100.85,307.85 107,314 107,319.55 108.1,320.65
  region net C4: 106.95,283.2 106.95,284.95 108.275,286.275 109.475,286.275 109.9,285.85 109.9,278.05 110.25,277.7 118.775,277.7 119.3,277.175 119.3,275.65 115.55,271.9 108.05,271.9 106.65,273.3 106.65,284.65 107.55,285.55
  region net GND: 118.75,270.8 118.6,270.95 118.6,273.85 123.7,278.95 143.7,278.95 145.85,276.8 145.85,265.25 143.9,263.3 136.5,263.3 136.225,263.575 136.95,264.3 140.05,264.3 142.7,266.95 142.7,275.4 142.2,275.9 142.15,275.85 136.25,275.85 134.3,273.9 127.65,273.9 125.85,272.1 125.85,270.75 125.1,270 119.5,270
  region net C3: 110.35,287 107.75,287 106.95,287.8 106.95,290.5 108.55,292.1 120.1,292.1 120.95,291.25 120.95,281.3 119.9,280.25 112,280.25 110.6,281.65 110.6,286.75
  region net C2: 140.45,292.6 126.3,292.6 125.15,291.45 125.15,281.85 126.45,280.55 138.2,280.55 140.65,283 140.65,292.4
  region net C1: 136.5,301.65 136.55,301.7 136.55,310.1 138.25,311.8 144.8,311.8 146.05,310.55 146.05,287.6 145.5,287.05 143.15,287.05 142.15,288.05 142.15,298 140.7,299.45 115.55,299.45 112.25,302.75 112.25,306.6 113,307.35 115.7,307.35 116.15,306.9 116.15,304 117.9,302.25 136.3,302.25 137.15,303.1
  region net AC1: 122.45,320.25 122.45,306 122.95,305.5 128.35,305.5 128.95,306.1 128.95,313.8 130.05,314.9 130.05,320.25

## Silkscreen, mask and mechanical layers (free items; w line width, h text height)
Bottom Overlay:
  circle w0.254: c142.35,132.75 r2.454
  circle w0.254: c113.55,317.1 r2.454
  circle w0.254: c126.1,317.1 r2.454
  circle w0.254: c143,303.7 r2.454
  circle w0.254: c141.486,103.938 r2.454
  circle w0.254: c131.347,103.938 r2.454
  circle w0.254: c116.303,103.938 r2.454
  circle w0.254: c105.59,103.938 r2.454
  circle w0.254: c123,110 r2.528
  circle w0.5: c123,110 r3.533
  circle w0.254: c104.5,193.7 r2.528
  circle w0.5: c104.5,193.7 r3.533
  circle w0.254: c141.5,193.7 r2.528
  circle w0.5: c141.5,193.7 r3.533
  circle w0.254: c104.5,316.9 r2.528
  circle w0.5: c104.5,316.9 r3.533
  circle w0.5: c141.5,316.9 r3.533
  circle w0.254: c141.5,316.9 r2.528
Mechanical 1:
  the board outline again, w0.254